# Altium PCB LTC2499 Test Board.PcbDoc
Units mm, origin at the board's own origin, x right, y up, seen from the top; angles counter-clockwise.
Board outline 26 x 26 mm, 2 copper layers (Top Layer, Bottom Layer); 18 components, 30 nets, 95 pads, 38 vias.
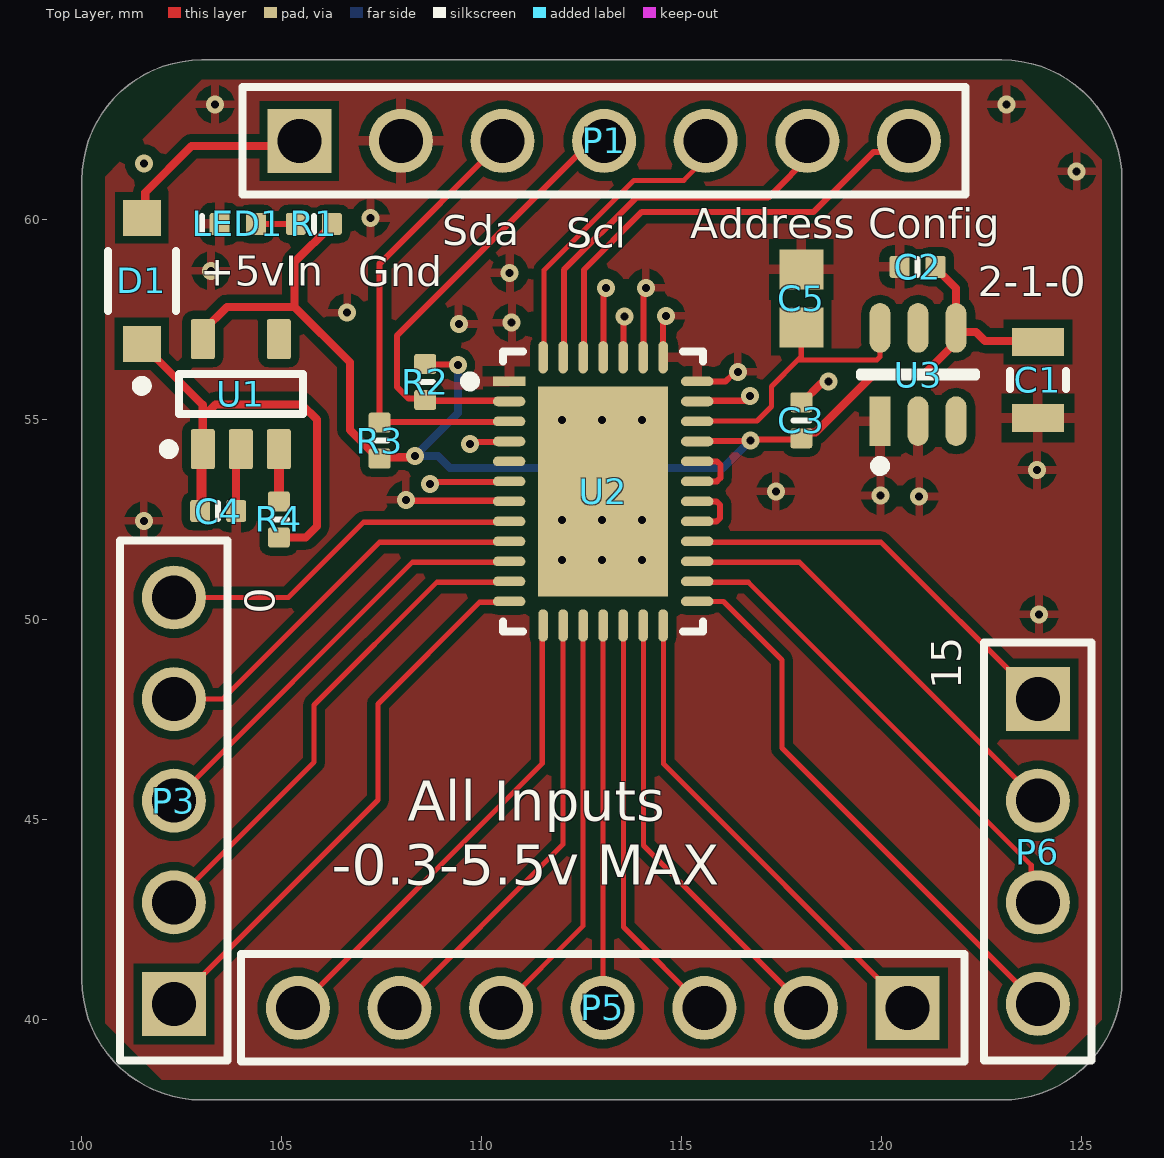
[diagram p0: Top Layer view]
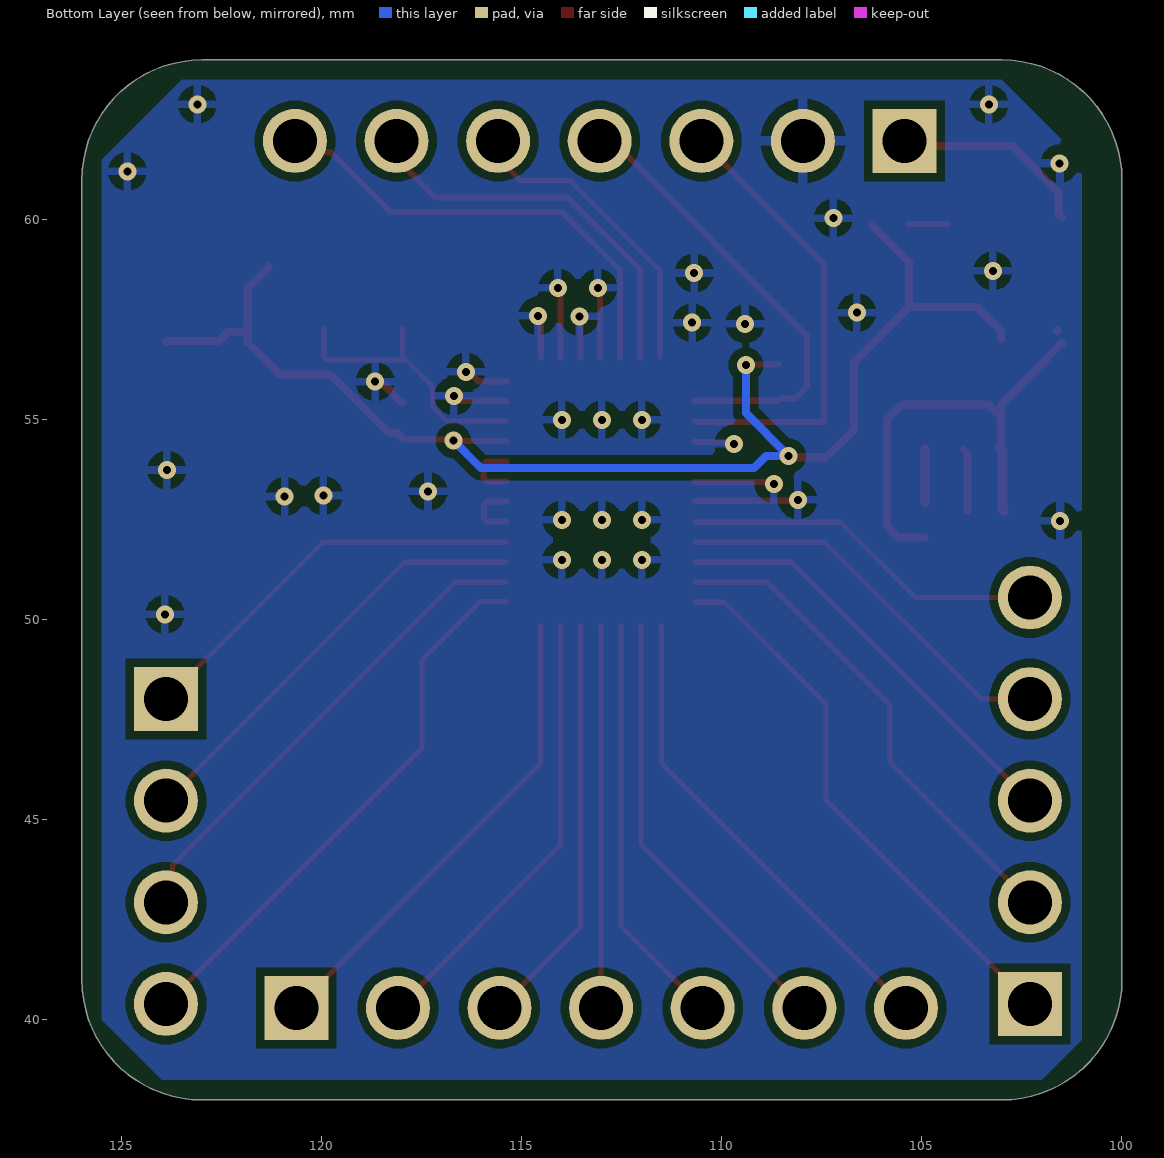
[diagram p1: Bottom Layer view, seen from below]
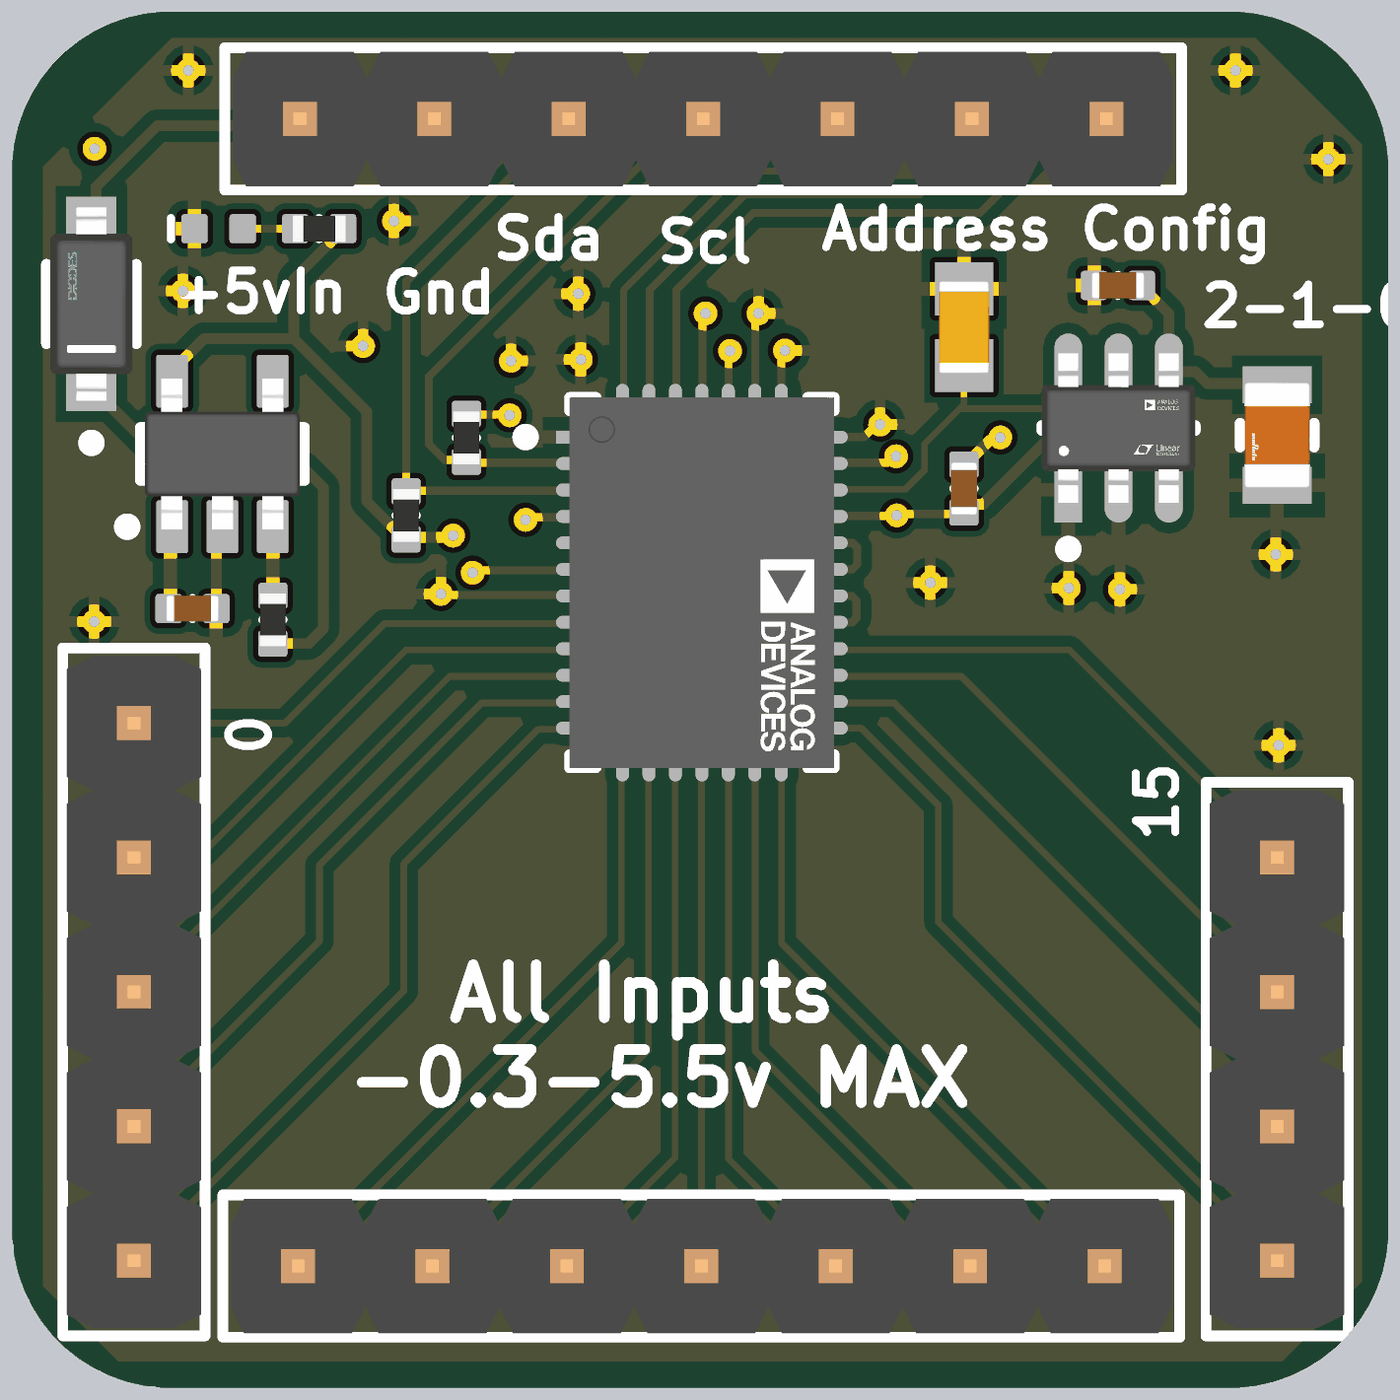
[diagram p2: 3D render of the assembled board from above, using the file's embedded part models]

## Layer stack, top to bottom
Top Solder: solder mask 0.0102, Solder Resist, Dk 3.5
Top Layer: signal copper 0.0356
Dielectric 1: dielectric 0.32, FR-4, Dk 4.8
Bottom Layer: signal copper 0.0356
Bottom Solder: solder mask 0.0102, Solder Resist, Dk 3.5

## Board outline
100,41 100,61 cw(c103,61) 103,64 123,64 cw(c123,61) 126,61 126,41 cw(c123,41) 123,38 103,38 cw(c103,41)

## Design rules (kind name [scope] priority, off if disabled: settings)
BoardOutlineClearance [All] p1: gap=0.2 ignorepadtopadclearanceinfootprint=FALSE except(0.4: Arc-SplitBarrior Arc-SplitContinuation Track-SplitBarrior Track-SplitContinuation SMDPad-SplitBarrior SMDPad-SplitContinuation THPad-SplitBarrior THPad-SplitContinuation Via-SplitBarrior Via-SplitContinuation Fill-SplitBarrior Fill-SplitContinuation Poly-SplitBarrior Poly-SplitContinuation Region-SplitBarrior Region-SplitContinuation Text-SplitBarrior Text-SplitContinuation)
Clearance "Clearance Bottom Layer" [OnLayer('Bottom Layer')] p1: gap=0.203 ignorepadtopadclearanceinfootprint=TRUE except(0.254: Arc-Text Track-Text SMDPad-Text THPad-Text Via-Text Fill-Text Poly-Text Region-Text Text-Text)
Clearance "Clearance Top Layer" [OnLayer('Top Layer')] p2: gap=0.203 ignorepadtopadclearanceinfootprint=TRUE except(0.254: Arc-Text Track-Text SMDPad-Text THPad-Text Via-Text Fill-Text Poly-Text Region-Text Text-Text)
Clearance [All] p3: gap=0.2 ignorepadtopadclearanceinfootprint=FALSE except(0.089: Arc-Arc Arc-Track Arc-SMDPad Track-Track Track-SMDPad SMDPad-SMDPad; 0.127: Arc-Via Track-Via SMDPad-Via THPad-Via Via-Via; 0.254: Arc-Text Track-Text SMDPad-Text THPad-Text Via-Text Fill-Text Poly-Text Region-Text Text-Text)
HoleSize [All] p1: absolutevalues=TRUE maxlimit=6.3 minlimit=0.2 maxpercent=80.000 minpercent=20.000
MinimumAnnularRing [All] p1: minimumring=0.076
MinimumSolderMaskSliver [All] p1: minsoldermaskwidth=0.1
PolygonConnect PolygonConnect_5 [All vs IsNamedPolygon('GND_L01_P001') Or IsNamedPolygon('GND_L02_P000')] p1: thpad.connectstyle=Relief thpad.reliefconductorwidth=0.254 thpad.reliefentries=4 thpad.polygonreliefangle="90 Angle" thpad.airgapwidth=0.254 smdpad.connectstyle=Relief smdpad.reliefconductorwidth=0.254 smdpad.reliefentries=4 smdpad.polygonreliefangle="90 Angle" smdpad.airgapwidth=0.254 via.connectstyle=Relief via.reliefconductorwidth=0.203 via.reliefentries=4 via.polygonreliefangle="90 Angle" via.airgapwidth=0.254
PolygonConnect PolygonConnect_4 [All vs IsNamedPolygon('GND_L02_P000')] p2: thpad.connectstyle=Relief thpad.reliefconductorwidth=0.254 thpad.reliefentries=4 thpad.polygonreliefangle="90 Angle" thpad.airgapwidth=0.254 smdpad.connectstyle=Relief smdpad.reliefconductorwidth=0.127 smdpad.reliefentries=4 smdpad.polygonreliefangle="90 Angle" smdpad.airgapwidth=0.254 via.connectstyle=Relief via.reliefconductorwidth=0.254 via.reliefentries=4 via.polygonreliefangle="90 Angle" via.airgapwidth=0.254
PolygonConnect PolygonConnect_3 [All vs IsNamedPolygon('GND_L01_P001')] p3: thpad.connectstyle=Relief thpad.reliefconductorwidth=0.254 thpad.reliefentries=4 thpad.polygonreliefangle="90 Angle" thpad.airgapwidth=0.254 smdpad.connectstyle=Relief smdpad.reliefconductorwidth=0.254 smdpad.reliefentries=4 smdpad.polygonreliefangle="90 Angle" smdpad.airgapwidth=0.254 via.connectstyle=Relief via.reliefconductorwidth=0.127 via.reliefentries=4 via.polygonreliefangle="90 Angle" via.airgapwidth=0.254
PolygonConnect PolygonConnect_2 [All vs IsNamedPolygon('GND_L01_P001')] p4: thpad.connectstyle=Relief thpad.reliefconductorwidth=0.254 thpad.reliefentries=4 thpad.polygonreliefangle="90 Angle" thpad.airgapwidth=0.254 smdpad.connectstyle=Relief smdpad.reliefconductorwidth=0.152 smdpad.reliefentries=4 smdpad.polygonreliefangle="90 Angle" smdpad.airgapwidth=0.254 via.connectstyle=Relief via.reliefconductorwidth=0.254 via.reliefentries=4 via.polygonreliefangle="90 Angle" via.airgapwidth=0.254
PolygonConnect [All vs IsNamedPolygon('GND_L01_P001')] p5: thpad.connectstyle=Relief thpad.reliefconductorwidth=0.152 thpad.reliefentries=4 thpad.polygonreliefangle="90 Angle" thpad.airgapwidth=0.254 smdpad.connectstyle=Relief smdpad.reliefconductorwidth=0.254 smdpad.reliefentries=4 smdpad.polygonreliefangle="90 Angle" smdpad.airgapwidth=0.254 via.connectstyle=Relief via.reliefconductorwidth=0.254 via.reliefentries=4 via.polygonreliefangle="90 Angle" via.airgapwidth=0.254
PolygonConnect PolygonConnect_1 [All] p6: thpad.connectstyle=Relief thpad.reliefconductorwidth=0.508 thpad.reliefentries=4 thpad.polygonreliefangle="90 Angle" thpad.airgapwidth=0.254 smdpad.connectstyle=Relief smdpad.reliefconductorwidth=0.508 smdpad.reliefentries=4 smdpad.polygonreliefangle="90 Angle" smdpad.airgapwidth=0.254 via.connectstyle=Direct via.reliefconductorwidth=0.508 via.reliefentries=4 via.polygonreliefangle="90 Angle" via.airgapwidth=0.254
RoutingCorners [All] p1: cornerstyle=Round minsetback=2.54 maxsetback=2.54
RoutingVias [All] p1: holewidth=0.5 width=1 viastyle="Through Hole" minholewidth=0.2 minwidth=0.45 maxholewidth=1 maxwidth=2
SilkToSilkClearance [All] p1: silktosilkclearance=0.1
SilkToSolderMaskClearance [IsPad] p1: minsilkscreentomaskgap=0.1 clearancetoexposedcopper=TRUE
SolderMaskExpansion [All] p1: expansion=0.102 istentingtop=FALSE
Width [All] p1: maxlimit=2.54 minlimit=0.089 preferedwidth=0.381
25 further rules are at their usual default settings.

## Classes and differential pairs
component class LTC2499Test: C1 C2 C3 C4 C5 LED1 P1 P3 P5 P6 R1 R2 R3 R4 U1 U2 U3

## Components (designator, comment, footprint, x,y, rotation, side; value= is the part's Value field where it differs from the comment)
C1 "GRM21BR60J226ME39L" FP-GRM21B-0_15-MFG 123.9,56 r270 top
C2 "Capacitor 100nF +/-20% 25V 0402" CAPC0402(1005)60_L 120.893,58.829 r0 top value=100nF
C3 "Capacitor 100nF +/-20% 25V 0402" CAPC0402(1005)60_L 117.984,54.991 r270 top value=100nF
C4 "Capacitor 100nF +/-20% 25V 0402" CAPC0402(1005)60_L 103.406,52.723 r180 top value=100nF
C5 "Capacitor 1uF +/- 10% 16V 0603" CAPC1608X90X35ML15T15 117.984,58.039 r270 top value=1µF
D1 "B0520LW-7-F" FP-SOD123-MFG 101.497,58.478 r90 top value=170pF
LED1 "QBLP595-IG" QTB-QBLP595_V 103.9,59.9 r0 top
P1 "61300711121" 61300711121 113.055,61.975 r0 top
P3 "61300511121" 61300511121 102.3,45.48 r90 top
P5 "61300711121" 61300711121 113.02,40.3 r180 top
P6 "61300411121" 61300411121 123.9,44.21 r270 top
R1 "Resistor 2K2  +/-5 % 0402 63 mW" RESC0402(1005)_L 105.8,59.9 r0 top value=2.2k
R2 "Resistor 2K2  +/-5 % 0402 63 mW" RESC0402(1005)_L 108.582,55.949 r90 top value=2.2k
R3 "Resistor 2K2  +/-5 % 0402 63 mW" RESC0402(1005)_L 107.443,54.483 r270 top value=2.2k
R4 "Resistor 2K2  +/-5 % 0402 63 mW" RESC0402(1005)_L 104.925,52.512 r270 top value=2.2k
U1 "TPS73150DBVT" DBV0005A_N 103.972,55.644 r90 top
U2 "LTC2499IUHF#PBF" FP-UHF-38-05-08-1701-IPC_C 113.031,53.213 r0 top
U3 "LT6654BHS6-4.096#TRMPBF" FP-S6-6-05-08-1636-IPC_B 120.904,56.134 r90 top

## Footprints (in the part's own frame and the unit in brackets; to place one, negate y for a bottom-side part, rotate by r counter-clockwise, add the part's x,y. Pads: shape width x height; smd on the part's side, far side on the other; paste and mask are expansions set on the pad)
61300411121 [mm] "Pin Header, pitch 2.54 mm, THT, Vertical, single row, 4p"
  rect 1.6x1.6 hole 1.1: 1(-3.81,0)
  round 1.6 hole 1.1: 2(-1.27,0) 3(1.27,0) 4(3.81,0)
  silkscreen extent -5.23,-1.35 5.23,1.35, body extent -5.08,-1.27 5.08,1.27, height 8.57
61300511121 [mm] "Pin Header, pitch 2.54 mm, THT, Vertical, single row, 5p"
  rect 1.6x1.6 hole 1.1: 1(-5.08,0)
  round 1.6 hole 1.1: 2(-2.54,0) 3(0,0) 4(2.54,0) 5(5.08,0)
  silkscreen extent -6.5,-1.35 6.5,1.35, body extent -6.35,-1.27 6.35,1.27, height 8.57
61300711121 [mm] "Pin Header, pitch 2.54 mm, THT, Vertical, single row, 7p"
  rect 1.6x1.6 hole 1.1: 1(-7.62,0)
  round 1.6 hole 1.1: 2(-5.08,0) 3(-2.54,0) 4(0,0) 5(2.54,0) 6(5.08,0) 7(7.62,0)
  silkscreen extent -9.04,-1.35 9.04,1.35, body extent -8.89,-1.27 8.89,1.27, height 8.57
CAPC0402(1005)60_L [mm] "Chip Capacitor, Body 1.0x0.5mm, Height 0.6mm, IPC High Density"
  rrect25% 0.5x0.55 smd: 1(-0.45,0) 2(0.45,0)
  silkscreen extent 0,-0.2 0,0.2, body extent -0.5,-0.25 0.5,0.25, height 0.6
CAPC1608X90X35ML15T15 [mm] "Chip Capacitor, 2-Leads, Body 1.75x0.95mm, IPC Low Density"
  rect 1x1.1 smd: 1(-0.725,0) 2(0.725,0)
  body extent -0.87,-0.48 0.87,0.48, height 0.9
DBV0005A_N [mm] "SOT23, 5-Leads, Body 3.05x1.75mm, Pitch 0.95mm, IPC Medium Density"
  rrect17% 1x0.6 smd: 1(-1.375,0.95) 2(-1.375,0) 3(-1.375,-0.95) 4(1.375,-0.95) 5(1.375,0.95)
  silkscreen extent -1.5,-1.55 0.5,1.92, body extent -1.42,-1.46 1.42,1.46, height 1.08
FP-GRM21B-0_15-MFG [mm]
  rect 0.7x1.3 smd paste+0 mask+0: 1(-0.95,0) 2(0.95,0)
  silkscreen extent -0.22,-0.7 0.23,0.7, body extent -1.4,-0.8 1.4,0.8, height 0.25
FP-S6-6-05-08-1636-IPC_B [mm]
  rect 1.24x0.526 smd paste+0 mask+0: 1(-1.166,0.95)
  rrect100% 1.24x0.526 smd paste+0 mask+0: 2(-1.166,0) 3(-1.166,-0.95) 4(1.166,-0.95) 5(1.166,0) 6(1.166,0.95)
  silkscreen extent -2.41,-1.45 0.05,1.45, body extent -2.04,-1.7 2.04,1.7, height 0.25
FP-SOD123-MFG [mm]
  rect 0.9x0.95 smd paste+0 mask+0: 1(-1.575,0) 2(1.575,0)
  silkscreen extent -2.75,-0.85 0.75,0.85, body extent -2.12,-0.95 2.12,0.95, height 0.25
FP-UHF-38-05-08-1701-IPC_C [mm]
  rect 0.81x0.242 smd paste+0 mask+0: 1(-2.351,2.75)
  rrect100% 0.81x0.242 smd paste+0 mask+0: 2(-2.351,2.25) 3(-2.351,1.75) 4(-2.351,1.25) 5(-2.351,0.75) 6(-2.351,0.25) 7(-2.351,-0.25) 8(-2.351,-0.75) 9(-2.351,-1.25) 10(-2.351,-1.75) 11(-2.351,-2.25) 12(-2.351,-2.75) 20(2.351,-2.75) 21(2.351,-2.25) 22(2.351,-1.75) 23(2.351,-1.25) 24(2.351,-0.75) 25(2.351,-0.25) 26(2.351,0.25) 27(2.351,0.75) 28(2.351,1.25) 29(2.351,1.75) 30(2.351,2.25) 31(2.351,2.75)
  rrect100% 0.242x0.81 smd paste+0 mask+0: 13(-1.5,-3.351) 14(-1,-3.351) 15(-0.5,-3.351) 16(0,-3.351) 17(0.5,-3.351) 18(1,-3.351) 19(1.5,-3.351) 32(1.5,3.351) 33(1,3.351) 34(0.5,3.351) 35(0,3.351) 36(-0.5,3.351) 37(-1,3.351) 38(-1.5,3.351)
  rect 3.25x5.25 smd paste-1000 mask+0: 39(0,0)
  silkscreen extent -3.46,-3.5 2.5,3.5, body extent -2.86,-3.86 2.86,3.86, height 0.25
QTB-QBLP595_V [mm] "SMD, 2-Leads, Body 1x0.5mm"
  rrect25% 0.5x0.55 smd: 1(-0.455,0) 2(0.455,0)
  silkscreen extent -0.9,-0.2 -0.9,0.2, body extent -0.5,-0.25 0.5,0.25, height 0.5
RESC0402(1005)_L [mm] "Chip Resistor, Body 1.0x0.5mm, IPC High Density"
  rrect25% 0.5x0.55 smd: 1(-0.45,0) 2(0.45,0)
  silkscreen extent 0,-0.2 0,0.2, body extent -0.5,-0.25 0.5,0.25, height 0.3

## Part data
C1: library part CMP-2007-03385-2, "Chip Multilayer Ceramic Capacitors for General Purpose, 0805, 22uF, X5R, 15%, 20%, 6.3V", Capacitance=22uF, Case Code (Imperial)=0805, Case Code (Metric)=2012, Dielectric=X5R, Max Operating Temperature=85°C, Min Operating Temperature=-55°C, Package Quantity=1, Tolerance=20%, Voltage=6.3V, Case/Package=0805, Depth=1.25mm, Height=1.25mm, Lead Free="Lead Free", Length=2mm, Material=Ceramic, Mount="Surface Mount", Packaging="Tape and Reel", Radiation Hardening=No, REACH SVHC="No SVHC", Termination=SMD/SMT, Thickness=0.053inch, Voltage Rating=6.3V, Voltage Rating (DC)=6.3V, Width=0.049inch
C2 C3 C4: library part CMP-001-00065-4, "Chip Capacitor, 100nF +/-20%, 25V, 0402, Thickness 0.6 mm", Case/Package=0402, Max Operating Temperature=85°C, Min Operating Temperature=-55°C, Tolerance=10%, Voltage Rating=25V, Mounting Technology=SMT, Pins=2
C5: library part CMP-001-00004-6, "Chip Capacitor, 1 uF, +/- 10%, 16 V, 0603 (1608 Metric)", Capacitor Type=Ceramic, Case/Package=0603, Max Operating Temperature=125°C, Min Operating Temperature=-55°C, Tolerance=10%, Voltage Rating=16V, Mounting Technology=SM, Pins=2, RoHS Compliant=True
D1: library part CMP-12790-000026-1, "DIODE SCHOTTKY 20V 500MA SOD123", Capacitance=170pF, Forward Current=0.5A, Manufacturer="Diodes Inc.", Max Junction Temp=+125°C, Max Repetitive Reverse Voltage=20V, Max Surge Forward Current=5.5A, Package=SOD123, Peak Reverse Current=250uA, Temperature="-65°C to +125°C", Temperature Range Low=-65°C, Automotive=No, Category=Diode, ComponentLink2Description=Datasheet, ComponentLink2URL=https://www.diodes.com/assets/Datasheets/ds30051.pdf, Device Class L1="Discrete Semiconductors", Device Class L2=Diodes, Device Class L3="Schottky Diodes", Digikey Description="DIODE SCHOTTKY 20V 500MA SOD123", Footprint Url=https://www.diodes.com/assets/Package-Files/SOD123.pdf, Height=1.45mm, Ipc Land Pattern Name=SOD365155X123-2, Lead Free=Yes, Manufacturer Part Number=B0520LW-7-F, Mouser Description="Schottky Diodes & Rectifiers 20V 410mW", Octopart=https://octopart.com/b0520lw-7-f-diodes+inc.-325707, Reverse Voltage=20V, RoHS=TRUE, Standoff Height=0mm, Temperature Range High=+125°C
LED1: library part CMP-007-00041-3, "Chip LED 0402, Green, 0.02 A, 3.1 to 3.7 V, -40 to 80 degC, 2-Pin SMD, RoHS, Tape and Reel", Case/Package=0402, Colour=Green, Mounting Technology=SMT, Pins=2, RoHS Compliant=Yes
P1 P5: library part CMP-1502-01074-1, "THT Vertical Pin Header WR-PHD, Pitch 2.54 mm, Single Row, 7 pins", Contact Resistance=20mOhm, Manufacturer="Wurth Elektronik", Operating Temperature=-40to105degC, Rated Current=3A, Withstanding Voltage=500VAC, Working Voltage=250VAC, Datasheet URL=https://katalog.we-online.de/em/datasheet/6130xx11121.pdf, Gender=Male, Manufacturer URL=http://www.we-online.de, Mounting Technology=THT, Orientation=Vertical, Package Reference=61300711121, Packaging=Bag, Part Number=61300711121, Pin Number=7, Pitch=2.54mm, Publisher=WurthElektronik, Row Number=Single
P3: library part CMP-1502-01068-1, "THT Vertical Pin Header WR-PHD, Pitch 2.54 mm, Single Row, 5 pins", Contact Resistance=20mOhm, Manufacturer="Wurth Elektronik", Operating Temperature=-40to105degC, Rated Current=3A, Withstanding Voltage=500VAC, Working Voltage=250VAC, Datasheet URL=https://katalog.we-online.de/em/datasheet/6130xx11121.pdf, Gender=Male, Manufacturer URL=http://www.we-online.de, Mounting Technology=THT, Orientation=Vertical, Package Reference=61300511121, Packaging=Bag, Part Number=61300511121, Pin Number=5, Pitch=2.54mm, Publisher=WurthElektronik, Row Number=Single
P6: library part CMP-1502-01064-1, "THT Vertical Pin Header WR-PHD, Pitch 2.54 mm, Single Row, 4 pins", Contact Resistance=20mOhm, Manufacturer="Wurth Elektronik", Operating Temperature=-40to105degC, Rated Current=3A, Withstanding Voltage=500VAC, Working Voltage=250VAC, Datasheet URL=https://katalog.we-online.de/em/datasheet/6130xx11121.pdf, Gender=Male, Manufacturer URL=http://www.we-online.de, Mounting Technology=THT, Orientation=Vertical, Package Reference=61300411121, Packaging=Bag, Part Number=61300411121, Pin Number=4, Pitch=2.54mm, Publisher=WurthElektronik, Row Number=Single
R1 R2 R3 R4: library part CMP-009-00166-3, "Chip Resistor, 2,2 kOhms, +/-5 %, 63 mW, -55 to 155 degC, 0402", Case/Package=0402, Max Operating Temperature=155°C, Min Operating Temperature=-55°C, Power=63mW, Tolerance=5%, Pins=2
U1: library part CMP-0394-00654-2, "Single Output Fast Transient Response LDO, 150 mA, Fixed 5 V Output, 1.7 to 5.5 V Input, 5-pin SOT-23 (DBV), -40 to 85 degC, Green (RoHS & no Sb/Br)", Manufacturer="Texas Instruments", Accuracy(%)=1, Code_JEDEC=MO-178, ComponentLink1Description="Manufacturer URL", ComponentLink1URL=http://www.ti.com/, ComponentLink2Description=Datasheet, ComponentLink2URL=http://www.ti.com/general/docs/lit/getliterature.tsp?genericPartNumber=TPS73150&fileType=pdf, ComponentLink3Description="Package Specification", ComponentLink3URL=http://www.ti.com/litv/pdf/mpds018i, DatasheetVersion=SBVS034M, Eco-Plan="Green (RoHS & no Sb/Br)", Fixed Output Options(V)=5, Iout(Max)(A)=0.15, Iq(Typ)(mA)=0.4, Mounting Technology="Surface Mount", PackageDescription="5-Pin Plastic Small Outline, Body 1.60 Ãƒâ€” 2.90 mm, Pitch 0.95 mm", PackageReference=DBV0005A, PackageVersion=4073253-4/K, PartNumber=TPS73150DBVT, SubFamily="Single Channel LDO", Vdo(Typ)(mV)=30, Vin(Max)(V)=5.5, Vin(Min)(V)=1.7, Vout Adj(Max)(V)=5, Vout Adj(Min)(V)=5
U2: library part CMP-09081-000017-1, "IC ADC 24BIT SIGMA-DELTA 38QFN", Case/Package=QFN, Max Operating Temperature=85°C, Max Supply Voltage=5.5V, Min Operating Temperature=-40°C, Min Supply Voltage=2.7V, Package Quantity=52, Interface=I2C, Lead Free="Lead Free", Mount="Surface Mount", Number of Bits=24, Number of Converters=1, Number of Elements=1, Number of Pins=38, Packaging=Rail/Tube, Polarity=Bipolar, Resolution=24b, RoHS Compliant=Yes, Sampling Rate=7.5S/s, Supply Type=Single
U3: library part CMP-09137-000044-1, "IC VREF SERIES 0.1% TSOT23-6", Case/Package=TSOT, Max Operating Temperature=125°C, Max Output Voltage=4.096V, Min Operating Temperature=-40°C, Output Current=10mA, Package Quantity=1, Quiescent Current=350uA, Temperature Coefficient=20ppm/°C, Tolerance=0.1%, Lead Free="Lead Free", Mount="Surface Mount", Number Of Channels=1, Number of Pins=6, Output Voltage=4.096V, Packaging="Tape and Reel", REACH SVHC="No SVHC", Reference Type=Series, Reference Voltage=4.096V, RoHS Compliant=Yes, Series=-

## Via types
v1: diameter 0.45, hole 0.2, Top Layer to Bottom Layer, 38 vias

## Nets (pads, with @x,y where several pads share a name; then routed paths per layer and width w, separated by ;. In a path a pad name is that pad's centre, name@x,y a point inside that pad or via, vN(x,y) a via of type N, cw(c..) or ccw(c..) an arc to the next point about the centre after c; other vN are vias at no path point)
+4.096V: C5.2 U2.29 U3.6 | length 7.1
  Top Layer w0.127: U2.29 115.395,54.976 116.876,54.976 117.237,55.337 117.237,55.836 117.904,56.502 ; C5.2 117.984,56.583 117.904,56.502 ; U3.6 119.954,56.577 119.88,56.502 117.904,56.502
+5V: C1.1 C2.2 C3.2 R1.2 R2.2 R3.2 U1.5 U2.28 U3.4 | length 35
  Top Layer w0.152: R2.2 108.593,56.387 109.388,56.387 v1(109.4,56.375) ; U2.28 115.392,54.473 116.703,54.473 v1(116.713,54.483) 116.742,54.512 117.98,54.512 C3.2@118.009,54.541
  Top Layer w0.203: U1.5 103.022,57.219 103.627,57.824 105.318,57.824 ; R1.2 106.25,59.875 105.318,58.943 105.318,57.824 ; v1(108.331,54.102) 108.297,54.068 107.478,54.068 R3.2 107.418,54.033 106.7,54.751 106.7,56.442 105.318,57.824 ; C3.2 118.132,54.689 118.342,54.689 119.786,56.134 121.045,56.134 121.854,56.943 U3.4 ; C2.2 121.343,58.804 121.854,58.292 U3.4 ; C1.1 123.875,56.975 122.575,56.975 122.35,57.2 121.954,57.2 U3.4
  Bottom Layer w0.203: v1(109.4,56.375) 109.4,55.171 v1(108.331,54.102) 108.898,54.102 109.2,53.8 116.03,53.8 v1(116.713,54.483)
+5Vin: C4.2 D1.1 R4.2 U1.1 | length 11.7
  Top Layer w0.203: D1.1 101.522,56.903 101.87,56.555 101.87,56.53 103.022,55.378 103.022,55.153 103.022,55.095 ; D1.1@101.609,57.234 D1.1@101.621,57.222 ; U1.1@103.083,54.33 103.022,54.391 103.022,55.075 103.337,55.39 105.496,55.39 105.877,55.009 105.877,52.342 105.597,52.062 R4.2
  Top Layer w0.254: C4.2 102.989,52.756 102.989,54.236 U1.1
ADCMUXN: U2.26 U2.27 | length 1.6
  Top Layer w0.152: U2.26 115.875,53.463 115.964,53.552 115.964,53.874 115.875,53.963 U2.27
ADCMUXP: U2.24 U2.25 | length 1.5
  Top Layer w0.152: U2.24 115.389,52.456 115.863,52.456 115.952,52.545 115.952,52.874 115.863,52.963 U2.25
CA0: P1.7 U2.36 | length 11.7
  Top Layer w0.152: U2.36 112.548,56.581 112.548,58.748 114,60.2 118.291,60.2 119.791,61.7 P1.7@120.84,61.7
CA1: P1.6 U2.37 | length 9.7
  Top Layer w0.152: U2.37 112.048,56.581 112.048,58.751 113.853,60.556 117.156,60.556 P1.6@118.3,61.7
CA2: P1.5 U2.38 | length 7.6
  Top Layer w0.127: U2.38 111.553,56.586 111.553,58.741 113.801,60.989 115.048,60.989 P1.5@115.76,61.7
CH0: P3.5 U2.8 | length 9.2
  Top Layer w0.127: P3.5 105.16,50.56 107.041,52.441 110.658,52.441 U2.8
CH1: P3.4 U2.9 | length 10
  Top Layer w0.127: P3.4 103.52,48.02 107.441,51.941 110.658,51.941 U2.9
CH2: P3.3 U2.10 | length 10.9
  Top Layer w0.127: P3.3 108.261,51.441 110.658,51.441 U2.10
CH3: P3.2 U2.11 | length 12.5
  Top Layer w0.127: P3.2 105.804,46.444 105.804,47.871 108.874,50.941 110.658,50.941 U2.11
CH4: P3.1 U2.12 | length 14
  Top Layer w0.127: P3.1 107.4,45.5 107.4,47.9 109.941,50.441 110.658,50.441 U2.12
CH5: P5.7 U2.13 | length 12.1
  Top Layer w0.127: P5.7 111.509,46.409 111.509,49.84 U2.13
CH6: P5.6 U2.14 | length 11.3
  Top Layer w0.127: P5.6 112.023,44.384 112.023,49.854 U2.14
CH7: P5.5 U2.15 | length 10.4
  Top Layer w0.127: P5.5 112.523,42.343 112.523,49.854 U2.15
CH8: P5.4 U2.16 | length 9.6
  Top Layer w0.127: P5.4 113.025,40.305 113.025,49.856 U2.16
CH9: P5.3 U2.17 | length 10.4
  Top Layer w0.127: U2.17 113.539,49.854 113.539,42.321 P5.3
CH10: P5.2 U2.18 | length 11.2
  Top Layer w0.127: U2.18 114.039,49.854 114.039,44.362 P5.2
CH11: P5.1 U2.19 | length 12.1
  Top Layer w0.127: U2.19 114.539,49.854 114.539,46.401 P5.1
CH12: P6.4 U2.20 | length 14
  Top Layer w0.127: U2.20 116.037,50.463 117.5,49 117.5,46.8 P6.4
CH13: P6.3 U2.21 | length 12.3
  Top Layer w0.127: U2.21 115.404,50.941 116.659,50.941 123.733,43.867 123.733,43.107 P6.3
CH14: P6.2 U2.22 | length 11
  Top Layer w0.127: U2.22 115.404,51.441 117.939,51.441 P6.2
CH15: P6.1 U2.23 | length 10.2
  Top Layer w0.127: U2.23 115.404,51.941 119.979,51.941 P6.1
GND: C1.2 C2.1 C3.1 C4.1 C5.1 LED1.1 P1.2 U1.2 U2.1 U2.4 U2.6 U2.7 U2.30 U2.31 U2.32 U2.33 U2.34 U2.35 U2.39 U3.1 U3.2 | length 15.7
  Top Layer w0.152: U1.2@103.856,54.153 U1.2 ; v1(108.1,53) 108.12,52.98 110.663,52.98 U2.7 ; v1(108.7,53.4) 108.746,53.446 110.663,53.446 U2.6 ; v1@109.728,54.429 109.745,54.446 110.663,54.446 U2.4 ; U2.35 113.043,56.576 113.043,58.23 v1@113.055,58.242 ; U2.34 113.534,56.568 113.534,57.578 v1@113.538,57.582 ; U2.33 114.038,56.572 114.038,58.235 v1@114.046,58.242 ; v1@114.529,57.582 114.53,57.581 114.53,56.565 U2.32 ; U2.30 115.399,55.48 116.567,55.48 v1@116.586,55.499 ; U2.31 116.092,55.963 116.252,56.123 v1@116.332,56.123
  Top Layer w0.203: C4.1 U1.2@103.856,54.153 ; C3.1 118.009,55.441 118.477,55.909 118.622,55.909 v1(118.669,55.956)
  other v1: 123.927,50.14 112,51.5 113,51.5 114,51.5 101.549,52.476 112,52.5 113,52.5 114,52.5 120.929,53.086 119.964,53.111 117.348,53.213 123.876,53.746 109.7,54.4 112,55 113,55 114,55 116.7,55.6 116.4,56.2 109.423,57.404 110.744,57.429 113.564,57.591 114.6,57.6 106.629,57.683 113.1,58.3 114.1,58.3 110.693,58.674 103.226,58.725 107.213,60.046 124.866,61.214 101.556,61.411 103.327,62.89 123.114,62.89
NetD1_2: D1.2 P1.1 | length 5.1
  Top Layer w0.203: D1.2 101.583,60.14 101.583,60.689 102.74,61.846 105.306,61.846 P1.1
NetLED1_2: LED1.2 R1.1 | length 1
  Top Layer w0.152: LED1.2 R1.1
NetR4_1: R4.1 U1.3 | length 1.3
  Top Layer w0.254: U1.3 104.924,54.267 104.924,52.963 R4.1
SCL: P1.4 R2.1 U2.2 | length 10.9
  Top Layer w0.152: U2.2 110.663,55.48 108.6,55.48 108.547,55.533 108.167,55.533 107.875,55.825 107.875,57.105 P1.4@112.57,61.8
SDA: P1.3 R3.1 U2.3 | length 11.6
  Top Layer w0.152: P1.3 107.443,58.903 R3.1 107.458,54.948 110.665,54.948 U2.3
pads on no net: U1.4 U2.5 U3.3 U3.5

## Polygon pours and split planes (outlines as drawn)
GND on Bottom Layer "GND_L02_P000" (solid, pour order 0): 103,63.5 101,61.5 101,39.5 102,38.5 124,38.5 125.5,40 125.5,61.5 123.5,63.5
GND on Top Layer "GND_L01_P001" (solid, remove dead copper, pour order 1): 103,63.5 100.584,61.084 100.584,39.916 102,38.5 124,38.5 125.5,40 125.5,61.5 123.5,63.5

## Silkscreen, mask and mechanical layers (free items; w line width, h text height)
Top Overlay:
  text "Address Config" at 115.209,59.547 h0.75
  text "Sda" at 109.007,59.361 h0.75
  text "Scl" at 112.111,59.303 h0.75
  text "+5vIn" at 102.963,58.354 h0.75
  text "Gnd" at 106.911,58.342 h0.75
  text "2-1-0" at 122.393,58.089 h0.75
  text "0" at 104.075,50.798 h0.75 r270
  text "15" at 121.985,48.262 h0.75 r90
  text "All Inputs" at 108.15,44.983 h1
  text "-0.3-5.5v MAX" at 106.245,43.38 h1
Mechanical 1:
  the board outline again, w0.1

## Dimensions
123,38 to 123,64 on Mechanical 1
100,41 to 126,41 on Mechanical 1